# EAGLE board Skaarhoj BI8-c330 (EAGLE 6.2)
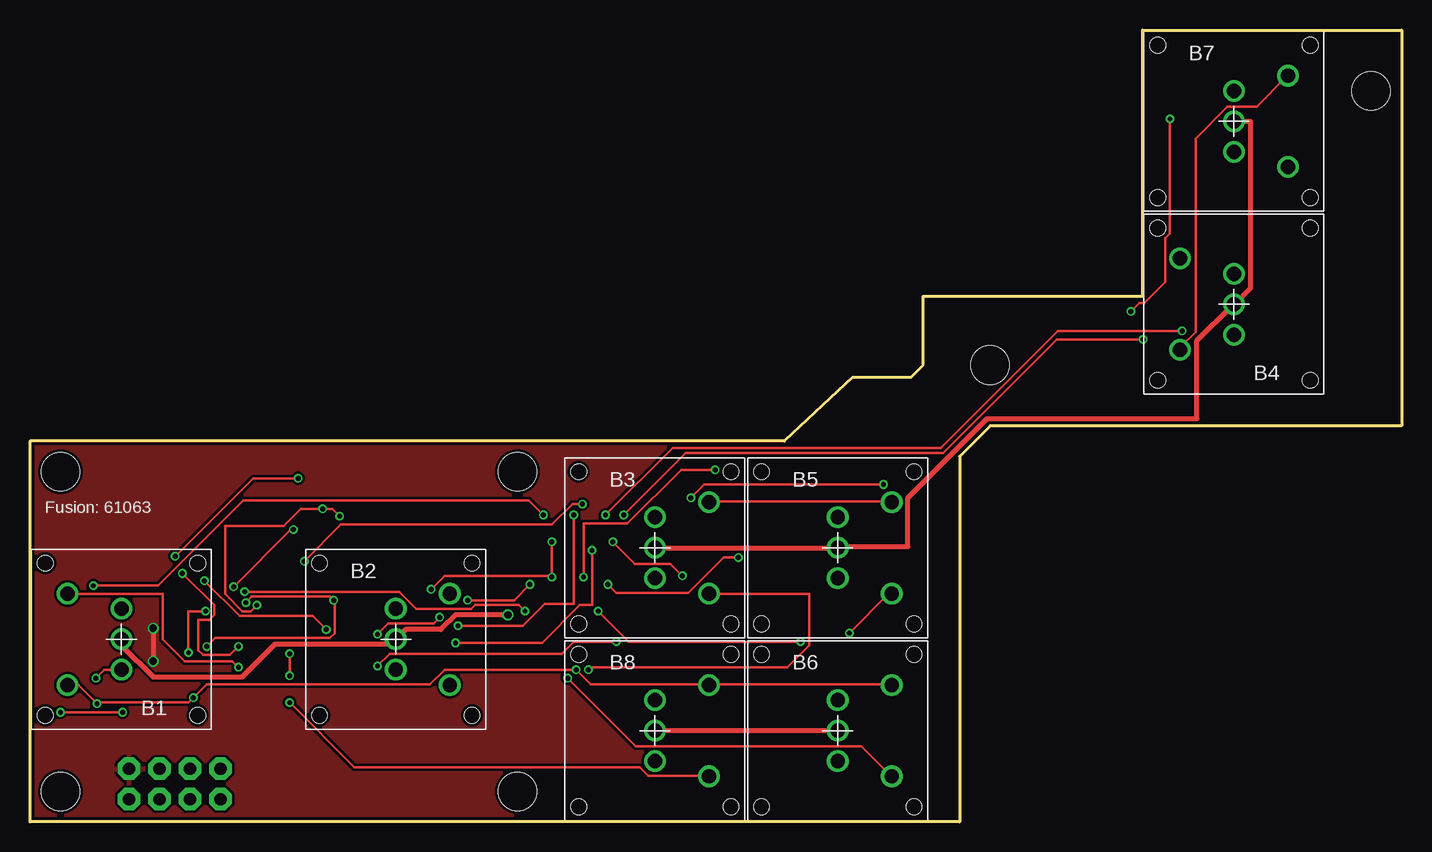
[diagram p0: board, top side]
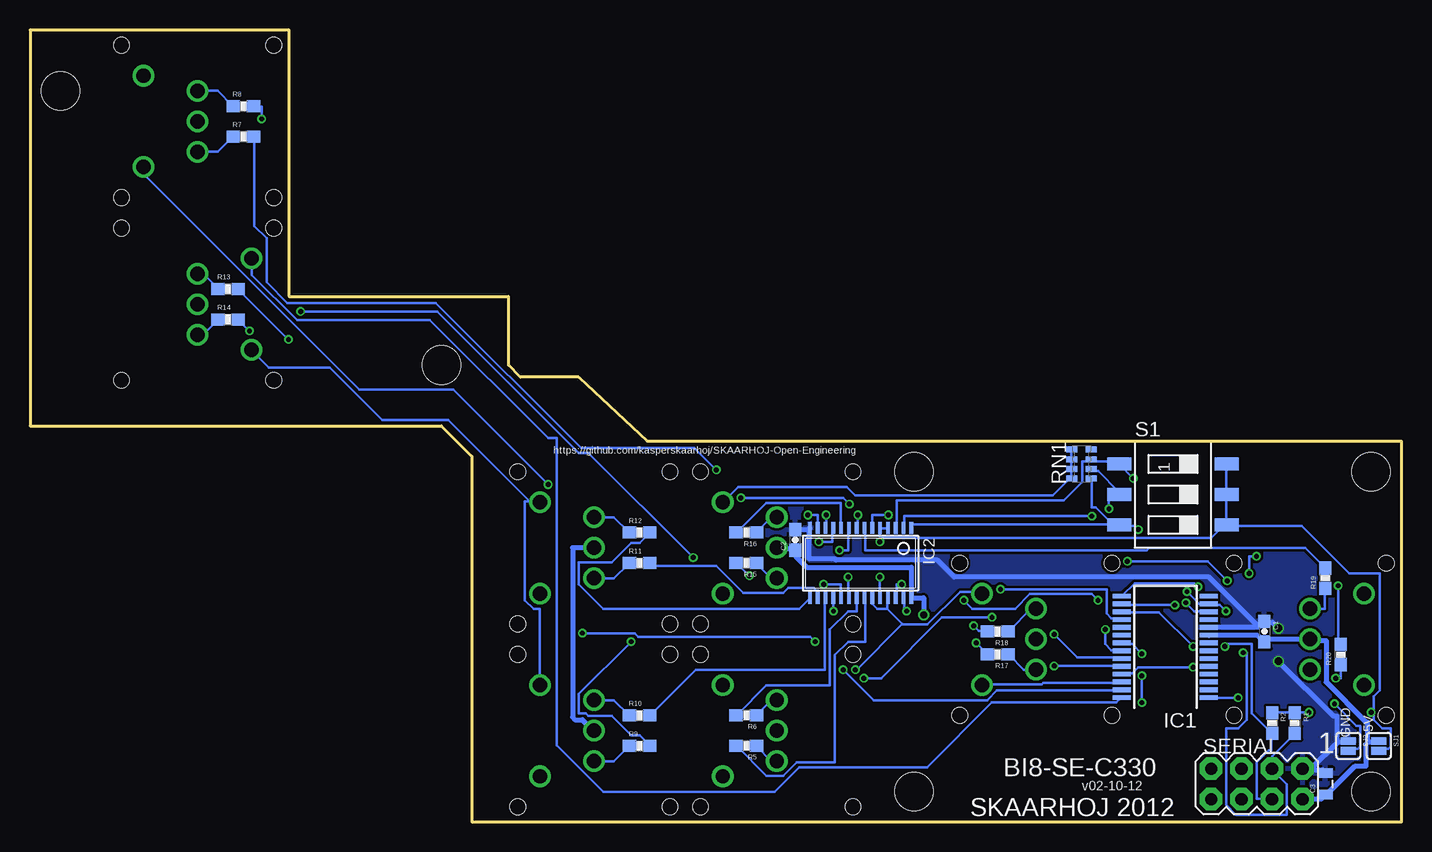
[diagram p1: board, bottom side, seen from below]

Size 114.3 x 66.04 mm. Coordinates in mm from the lower left corner, seen from the top.
Outline: 0,0 0,31.75 62.87,31.75 68.58,37.08 73.43,37.08 74.42,38.1 74.42,43.81 92.71,43.81 92.71,66.04 114.3,66.04 114.3,33.02 80.01,33.02 77.47,30.48 77.47,0 0,0
Copper layers (1*16): Top 0.035mm / dielectric 1.5mm / Bottom 0.035mm
Design rules: minimum track width 6mil, minimum drill 12mil, track to track 6mil, track to pad 6mil, pad to pad 6mil, via to via 6mil, smd to smd 0mil, copper to edge 10mil, drill to drill 10mil, minimum pad ring 10mil, minimum via ring 6mil, stop-mask expansion 2mil, vias tented up to drill 100mil, thermal gap 10mil
Net classes: 0 default: width 0.203 mm, drill 0.406 mm, clearance 0.203 mm; 1 Power: width 0.406 mm, drill 0.61 mm, clearance 0.203 mm
Holes 3.2 mm at 2.54,2.54 2.54,29.21 40.64,29.21 40.64,2.54 111.76,60.96 80.01,38.1

## Footprints (pad centres in the part's own frame; a part is rotated, then mirrored left to right if it is on the bottom)
LP11 = drill 1.2: COM 0,0; P$2 0,2.54; P$3 0,-2.54; P$4 4.5,3.81; P$5 4.5,-3.81 | hole 1.3: -6.35,6.35; 6.35,6.35; 6.35,-6.35; -6.35,-6.35
0603-CAP = smd 1.1 x 1: 1 -0.85,0; 2 0.85,0
0805 = smd 0.8 x 1.2: 1 -0.9,0; 2 0.9,0
SSOP28 = smd 0.4 x 1.5: 1 -4.225,-3.625; 2 -3.575,-3.625; 3 -2.925,-3.625; 4 -2.275,-3.625; 5 -1.625,-3.625; 6 -0.975,-3.625; 7 -0.325,-3.625; 8 0.325,-3.625; 9 0.975,-3.625; 10 1.625,-3.625; 11 2.275,-3.625; 12 2.925,-3.625; 13 3.575,-3.625; 14 4.225,-3.625; 15 4.225,3.625; 16 3.575,3.625; 17 2.925,3.625; 18 2.275,3.625; 19 1.625,3.625; 20 0.975,3.625; 21 0.325,3.625; 22 -0.325,3.625; 23 -0.975,3.625; 24 -1.625,3.625; 25 -2.275,3.625; 26 -2.925,3.625; 27 -3.575,3.625; 28 -4.225,3.625
TSSOP28 = smd 0.305 x 0.991: 1 -4.225,-2.918; 2 -3.575,-2.918; 3 -2.925,-2.918; 4 -2.275,-2.918; 5 -1.625,-2.918; 6 -0.975,-2.918; 7 -0.325,-2.918; 8 0.325,-2.918; 9 0.975,-2.918; 10 1.625,-2.918; 11 2.275,-2.918; 12 2.925,-2.918; 13 3.575,-2.918; 14 4.225,-2.918; 15 4.225,2.918; 16 3.575,2.918; 17 2.925,2.918; 18 2.275,2.918; 19 1.625,2.918; 20 0.975,2.918; 21 0.325,2.918; 22 -0.325,2.918; 23 -0.975,2.918; 24 -1.625,2.918; 25 -2.275,2.918; 26 -2.925,2.918; 27 -3.575,2.918; 28 -4.225,2.918
0603-RES = smd 1.1 x 1: 1 -0.85,0; 2 0.85,0
CAY16_HAND = smd 0.5 x 0.904: 1 -1.2,-0.813; 2 -0.4,-0.813; 3 0.4,-0.813; 4 1.2,-0.813; 5 1.2,0.813; 6 0.4,0.813; 7 -0.4,0.813; 8 -1.2,0.813
SMS-003 = smd 1.092 x 2.007: 1 -2.54,-4.496; 2 0,-4.496; 3 2.54,-4.496; 4 2.54,4.496; 5 0,4.496; 6 -2.54,4.496
2X4 = drill 1.016 pad 1.88 octagon: 1 -3.81,-1.27; 2 -3.81,1.27; 3 -1.27,-1.27; 4 -1.27,1.27; 5 1.27,-1.27; 6 1.27,1.27; 7 3.81,-1.27; 8 3.81,1.27
SJ_2S = smd 0.635 x 1.27: 1 -0.412,0; 2 0.412,0

## Placement (x,y rotation side)
B1  LP11-B"  [LP11]  7.62,15.24 180 top
B2  LP11-B"  [LP11]  30.48,15.24 0 top
B3  LP11-B"  [LP11]  52.07,22.86 0 top
B4  LP11-B"  [LP11]  100.33,43.18 180 top
B5  LP11-B"  [LP11]  67.31,22.86 0 top
B6  LP11-B"  [LP11]  67.31,7.62 0 top
B7  LP11-B"  [LP11]  100.33,58.42 0 top
B8  LP11-B"  [LP11]  52.07,7.62 0 top
C1  100nF  [0603-CAP]  11.43,15.88 270 bottom
C2  100nF  [0603-CAP]  50.52,23.52 90 bottom
C3  10uF  [0805]  6.35,3.17 90 bottom
IC1  MCP23017SS  [SSOP28]  19.68,14.61 90 bottom
IC2  PCA9685  [TSSOP28]  45.09,21.59 180 bottom
R1  10K  [0603-RES]  8.89,8.26 270 bottom
R2  10K  [0603-RES]  10.79,8.26 270 bottom
R5  270  [0603-RES]  54.61,6.35 180 bottom
R6  270  [0603-RES]  54.61,8.89 180 bottom
R7  270  [0603-RES]  96.52,57.15 0 bottom
R8  270  [0603-RES]  96.52,59.69 0 bottom
R9  270  [0603-RES]  63.5,6.35 0 bottom
R10  270  [0603-RES]  63.5,8.89 0 bottom
R11  270  [0603-RES]  63.5,21.59 0 bottom
R12  270  [0603-RES]  63.5,24.13 0 bottom
R13  270  [0603-RES]  97.79,44.45 0 bottom
R14  270  [0603-RES]  97.79,41.91 0 bottom
R15  270  [0603-RES]  54.61,21.59 180 bottom
R16  270  [0603-RES]  54.61,24.13 180 bottom
R17  270  [0603-RES]  33.66,13.97 180 bottom
R18  270  [0603-RES]  33.66,15.88 180 bottom
R19  270  [0603-RES]  6.35,20.32 90 bottom
R20  270  [0603-RES]  5.08,13.97 90 bottom
RN1  10K  [CAY16_HAND]  26.67,29.84 270 bottom
S1  SWS003  [SMS-003]  19.05,27.3 270 bottom
SERIAL  M04X2  [2X4]  12.06,3.17 180 bottom
SJ1  SOLDERJUMPERNC  [SJ_2S]  1.91,6.35 270 bottom
SJ2  SOLDERJUMPERNC  [SJ_2S]  4.45,6.35 270 bottom

## Library data of the parts
B1-B8 = SKAARHOJ
C1-C3 R1 R2 R5-R20 SERIAL SJ1 SJ2 = SparkFun
IC1 = microchip; MF: MICROCHIP; MPN: MCP23017-E/SS; OC_FARNELL: 1467674; OC_NEWARK: 31K2960
IC2 = wsmith
RN1 = SKAARHOJ; OC_FARNELL: unknown; OC_NEWARK: unknown
S1 = smd-special

## Nets
5V [Power]: B1.COM B2.COM B3.COM B4.COM B5.COM B6.COM B7.COM B8.COM C1.2 C2.1 C3.1 IC1.9 IC2.28 SERIAL.2 SJ1.1
5VL: IC1.18 IC2.4 IC2.5 IC2.24 R1.1 R2.1 S1.4 S1.5 S1.6 SJ1.2
A0: IC1.15 IC2.1 RN1.5 S1.3
A1: IC1.16 IC2.2 RN1.6 S1.2
A2: IC1.17 IC2.3 RN1.7 S1.1
DISP_DATA_OUT: SERIAL.6
GND [Power]: C1.1 C2.2 C3.2 IC1.10 IC2.14 SERIAL.1 SJ2.1
GNDL: B1.P$4 B2.P$4 B3.P$4 B4.P$4 B5.P$4 B6.P$4 B7.P$4 B8.P$4 IC1.1 IC2.23 IC2.25 RN1.1 RN1.2 RN1.3 RN1.4 SJ2.2
GPA0: B8.P$5 IC1.21
GPA1: B7.P$5 IC1.22
GPA2: B6.P$5 IC1.23
GPA3: B5.P$5 IC1.24
GPA4: B1.P$5 IC1.25
GPA5: B2.P$5 IC1.26
GPA6: B3.P$5 IC1.27
GPA7: B4.P$5 IC1.28
I2C_SCL: IC1.12 IC2.26 R2.2 SERIAL.4
I2C_SDA: IC1.13 IC2.27 R1.2 SERIAL.3
L0: B1.P$2 R20.1
L1: B1.P$3 R19.1
L2: B2.P$2 R18.1
L3: B2.P$3 R17.1
L4: B3.P$2 R16.1
L5: B3.P$3 R15.1
L6: B4.P$2 R14.1
L7: B4.P$3 R13.1
L8: B5.P$2 R12.1
L9: B5.P$3 R11.1
L10: B6.P$2 R10.1
L11: B6.P$3 R9.1
L12: B7.P$2 R8.1
L13: B7.P$3 R7.1
L14: B8.P$2 R6.1
L15: B8.P$3 R5.1
N$4: IC2.13 R13.2
N$5: IC2.12 R14.2
N$7: IC2.11 R15.2
N$9: IC2.10 R16.2
N$10: IC2.9 R17.2
N$11: IC2.8 R18.2
N$12: IC2.7 R19.2
N$19: IC2.6 R20.2
N$20: IC2.15 R12.2
N$21: IC2.16 R11.2
N$22: IC2.17 R10.2
N$23: IC2.18 R9.2
N$24: IC2.19 R8.2
N$25: IC2.20 R7.2
N$26: IC2.21 R6.2
N$27: IC2.22 R5.2
SDI_MOSI: SERIAL.8
SDI_SCLK: SERIAL.7
SLIDER_IN: SERIAL.5

## Tracks (layer width: path | path; a pad name or v marks a point on that pad's centre or on a via)
5V  (via drill 0.61)
  Top 0.406: B1.COM 7.62,14.73 10.26,12.09 17.68,12.09 20.42,14.83 30.07,14.83 B2.COM 31.29,16.05 34.24,16.05 35.46,17.27 v39.83,17.27 | B7.COM 101.7,58.42 101.7,44.5 100.38,43.18 B4.COM 100.18,43.08 97.23,40.13 97.23,33.63 79.76,33.63 73.15,27.03 73.15,22.96 67.46,22.96 B5.COM B3.COM | B6.COM B8.COM
  Bottom 0.406: SERIAL.2 8.23,1.93 6.71,1.93 6.4,2.23 C3.1 6.2,2.34 3.86,4.67 2.95,4.67 2.95,6.5 2.74,6.71 | 2.74,6.71 1.93,6.71 SJ1.1 | IC1.9 16.05,15.54 11.99,15.54 11.58,15.14 C1.2 11.38,15.04 11.18,15.24 B1.COM 7.52,15.14 6.3,15.14 6.3,11.68 2.95,8.33 2.85,8.33 2.85,6.81 2.74,6.71 | 40.84,18.69 40.84,21.23 49.58,21.23 50.49,22.15 50.49,22.66 C2.1 50.7,22.76 51.92,22.76 52.02,22.86 B3.COM | 40.84,18.69 IC2.28 | B5.COM 69.09,22.86 69.09,8.74 68.89,8.53 68.28,8.53 67.36,7.62 B6.COM | v39.83,17.27 39.83,18.69 40.84,18.69
5VL  (via drill 0.41)
  Top 0.203: v43.48,23.37 43.48,20.52 | v33.43,19.41 34.54,20.52 43.48,20.52 | 43.48,20.52 v43.48,20.42 | v2.54,9.14 v7.72,9.14
  Bottom 0.203: v43.48,20.42 43.48,18.69 IC2.24 | 43.48,23.67 43.48,24.49 IC2.5 43.38,24.49 42.88,24.49 IC2.4 | v33.43,19.41 24.59,19.41 24.59,17.37 24.18,16.97 23.37,16.97 IC1.18 | S1.6 14.63,29.77 14.63,27.33 S1.5 14.63,27.23 14.63,24.79 S1.4 | R2.1 10.77,9.14 8.94,9.14 R1.1 8.84,9.14 v7.72,9.14 | 2.34,9.14 2.34,10.46 1.83,10.97 1.83,20.73 4.37,20.73 8.33,24.69 14.53,24.69 S1.4 | 2.34,9.14 2.34,8.53 1.63,7.82 0.91,7.82 0.91,6.3 1.12,6.1 1.73,6.1 1.83,5.99 SJ1.2 | 2.34,9.14 v2.54,9.14 | 43.48,23.67 15.85,23.67 14.73,24.79 S1.4 | 43.48,23.67 v43.48,23.37
A0  (via drill 0.41)
  Top 0.203: v16.97,19.61 21.74,24.38 v21.95,24.38
  Bottom 0.203: RN1.5 25.81,28.55 25.81,26.21 25.5,26.21 24.08,24.79 23.57,24.79 S1.3 | IC2.1 40.84,24.59 40.64,24.79 24.18,24.79 S1.3 | v16.97,19.61 17.27,19.91 22.25,19.91 23.27,18.9 IC1.15 | v21.95,24.38 22.25,24.69 23.47,24.69 S1.3
A1  (via drill 0.41)
  Top 0.203: v25.81,25.5 25.2,26.11 v24.38,26.11 22.55,26.11 21.13,24.69 16.26,24.69 16.26,19 17.68,17.58 18.39,17.58 v18.9,18.09
  Bottom 0.203: RN1.6 25.81,29.36 25.7,29.26 25.3,29.26 23.57,27.53 23.57,27.33 S1.2 23.57,27.23 24.38,27.23 v24.38,26.11 | v25.81,25.5 41.45,25.5 41.45,24.59 IC2.2 | v18.9,18.09 23.27,18.09 IC1.16
A2  (via drill 0.41)
  Top 0.203: v17.37,14.63 16.66,13.92 14.43,13.92 14.02,14.33 14.02,16.87 14.94,16.87 15.34,17.27 15.34,18.09 v12.7,20.73 | v12.09,22.15 18.59,28.65 v22.35,28.65
  Bottom 0.203: IC2.3 42.06,24.59 42.06,26.82 28.14,26.82 26.62,28.35 26.62,30.07 25.81,30.07 RN1.7 25.81,30.18 25.7,30.07 23.77,30.07 S1.1 v22.35,28.65 | v17.37,14.63 20.22,17.48 23.27,17.48 IC1.17 | v12.7,20.73 12.7,22.15 v12.09,22.15
GND  (via drill 0.61)
  Top 0.406: v10.26,16.15 v10.26,13.41
  Bottom 0.406: C3.2 6.4,4.17 6.6,4.37 8.23,4.37 SERIAL.1 7.52,4.47 5.28,6.71 | 5.28,6.71 4.47,6.71 SJ2.1 | C2.2 50.49,24.38 49.48,24.38 49.38,24.49 IC2.14 49.38,24.28 49.38,21.95 47.24,21.95 47.14,21.84 38.71,21.84 37.29,20.42 16.05,20.42 11.89,16.26 | 11.89,16.26 11.48,16.66 C1.1 11.28,16.66 10.77,16.66 v10.26,16.15 | 11.89,16.26 16.05,16.26 IC1.10 | v10.26,13.41 5.69,8.84 5.38,8.84 5.38,6.81 5.28,6.71
  pour Bottom: 0,0 0,66.04 114.3,66.04 114.3,0
  pour Top: 0,0 0,66.04 114.3,66.04 114.3,1.91 114.3,0.64 79.38,0.64 79.38,0
GNDL  (via drill 0.41)
  Top 0.203: B1.P$4 3.15,11.38 4.06,11.38 v5.59,9.86 5.59,9.96 13.21,9.96 v13.61,10.36 14.73,11.48 33.33,11.48 34.54,12.7 v45.52,12.7 46.74,11.48 56.49,11.48 B8.P$4 56.59,11.48 71.73,11.48 B6.P$4 | B5.P$4 71.73,26.72 56.59,26.72 B3.P$4 | B7.P$4 104.75,62.18 102.21,59.64 99.77,59.64 97.13,57 97.13,40.84 95.91,39.62 95.91,39.42 B4.P$4
  Bottom 0.203: v5.59,9.86 3.76,8.03 3.45,8.03 3.45,6.3 3.66,6.1 4.27,6.1 4.37,5.99 SJ2.2 | v13.61,10.36 16.05,10.36 IC1.1 | 42.88,17.78 42.88,18.59 IC2.25 | 42.88,17.78 43.69,17.78 44.09,18.19 44.09,18.59 IC2.23 | 41.6,16.51 41.55,16.46 39.52,16.46 36.78,19.2 35.15,19.2 35.05,19.1 B2.P$4 | 41.6,16.51 42.88,17.78 | 41.6,16.51 45.41,12.7 v45.52,12.7 | RN1.1 27.53,30.99 27.53,30.28 RN1.2 27.53,30.18 27.53,29.46 RN1.3 27.53,29.36 27.53,28.65 RN1.4 27.64,28.65 29.06,27.23 45.52,27.23 46.23,27.94 55.27,27.94 56.49,26.72 B3.P$4 | 72.69,26.77 72.64,26.72 71.83,26.72 B5.P$4 | 72.69,26.77 79.45,33.53 84.94,33.53 89.31,37.9 94.39,37.9 95.81,39.32 B4.P$4 | B6.P$4 71.83,11.48 71.83,17.78 72.34,17.78 73.05,18.49 73.05,26.72 72.75,26.72 72.69,26.77
GPA0  (via drill 0.41)
  Top 0.203: v21.64,12.19 v21.64,14.02 | v21.64,9.96 27.03,4.57 50.8,4.57 51.51,3.86 56.49,3.86 B8.P$5
  Bottom 0.203: v21.64,14.02 22.45,14.83 23.27,14.83 IC1.21 | v21.64,9.96 v21.64,12.19
GPA1  (via drill 0.41)
  Top 0.203: v24.69,16.05 23.57,17.17 17.48,17.17 v14.53,20.12 | v22.86,21.74 25.91,24.79 43.48,24.79 45.21,26.52 v46.02,26.52 | v55.07,27.03 56.19,28.14 v71.12,28.14
  Bottom 0.203: v24.69,16.05 24.69,14.83 24.18,14.33 23.37,14.33 IC1.22 | v14.53,20.12 16.15,21.74 v22.86,21.74 | v46.02,26.52 46.53,27.03 v55.07,27.03 | v71.12,28.14 79.05,36.07 86.87,36.07 104.75,53.95 104.75,54.56 B7.P$5
GPA2  (via drill 0.41)
  Top 0.203: v28.96,15.65 29.87,16.56 33.63,16.56 v34.14,17.07 | v44.81,11.99 50.49,6.3 69.29,6.3 71.73,3.86 B6.P$5
  Bottom 0.203: v28.96,15.65 27.03,13.72 23.37,13.72 IC1.23 | v34.14,17.07 38.3,17.07 43.38,11.99 v44.81,11.99
GPA3  (via drill 0.41)
  Top 0.203: v28.96,13.01 29.97,14.02 44.3,14.02 45.31,15.04 v48.87,15.04 | v68.28,15.75 71.53,19 71.73,19 B5.P$5
  Bottom 0.203: v28.96,13.01 23.37,13.01 IC1.24 | v48.87,15.04 49.28,15.44 63.6,15.44 63.91,15.75 v68.28,15.75
GPA4  (via drill 0.41)
  Top 0.203: v17.37,12.9 16.87,13.41 12.9,13.41 11.07,15.24 11.07,19 3.15,19 B1.P$5
  Bottom 0.203: v17.37,12.9 21.95,12.9 22.45,12.39 23.27,12.39 IC1.25
GPA5
  Bottom 0.203: IC1.26 23.37,11.58 29.87,11.58 29.97,11.48 34.95,11.48 B2.P$5
GPA6  (via drill 0.41)
  Top 0.203: v46.53,12.7 46.74,12.9 63.09,12.9 64.92,14.73 64.92,19 56.59,19 B3.P$5
  Bottom 0.203: v46.53,12.7 43.99,10.16 34.54,10.16 33.73,10.97 23.37,10.97 IC1.27
GPA7
  Bottom 0.203: IC1.28 23.37,10.36 23.77,9.96 34.14,9.96 39.52,4.57 50.19,4.57 52.22,2.54 66.55,2.54 70.41,6.4 70.41,32 71.12,32 80.97,41.86 92.05,41.86 95.81,45.62 95.81,46.94 B4.P$5
I2C_SCL  (via drill 0.41)
  Top 0.203: v41.66,19.81 40.34,18.49 v36.47,18.49 | v17.98,18.29 18.49,18.8 24.99,18.8 v25.3,18.49 25.4,18.49 25.4,15.75 24.99,15.34 15.44,15.34 v14.73,14.63
  Bottom 0.203: SERIAL.4 10.87,1.93 12.09,1.93 12.09,4.98 11.07,5.99 10.87,5.99 10.87,7.32 R2.2 10.87,7.42 12.5,9.04 12.5,14.83 14.53,14.83 v14.73,14.63 | v41.66,19.81 42.06,19.81 42.06,18.69 IC2.26 | v36.47,18.49 35.76,17.78 32.21,17.78 30.99,19 25.81,19 v25.3,18.49 | v17.98,18.29 17.27,17.58 16.15,17.58 IC1.12
I2C_SDA  (via drill 0.41)
  Top 0.203: v41.25,17.58 40.74,18.09 37.08,18.09 36.78,17.78 32.21,17.78 30.79,19.2 v17.88,19.2 | v13.21,14.12 13.21,17.58 v14.63,17.58
  Bottom 0.203: R1.2 8.94,7.32 10.77,5.49 10.77,4.47 SERIAL.3 10.77,4.37 9.55,3.15 9.55,0.61 13.82,0.61 14.63,1.42 14.63,7.82 13.61,7.82 12.9,8.53 12.9,14.12 v13.21,14.12 | v41.25,17.58 41.45,17.58 41.45,18.59 IC2.27 | v17.88,19.2 16.87,18.19 16.15,18.19 IC1.13 16.05,18.09 15.14,18.09 v14.63,17.58
L0  (via drill 0.41)
  Top 0.203: v5.49,11.99 6.2,12.7 B1.P$2
  Bottom 0.203: R20.1 5.08,11.99 v5.49,11.99
L1
  Bottom 0.203: B1.P$3 6.4,17.78 6.4,19.41 R19.1
L2
  Bottom 0.203: B2.P$2 30.89,17.78 32.72,15.95 R18.1
L3
  Bottom 0.203: B2.P$3 31.5,12.7 32.72,13.92 R17.1
L4
  Bottom 0.203: B3.P$2 52.53,25.4 53.75,24.18 R16.1
L5
  Bottom 0.203: B3.P$3 52.53,20.32 53.75,21.54 R15.1
L6
  Bottom 0.203: B4.P$2 99.87,40.64 98.65,41.86 R14.1
L7
  Bottom 0.203: B4.P$3 99.87,45.72 98.65,44.5 R13.1
L8
  Bottom 0.203: B5.P$2 65.63,25.4 64.41,24.18 R12.1
L9
  Bottom 0.203: B5.P$3 65.63,20.32 64.41,21.54 R11.1
L10
  Bottom 0.203: B6.P$2 65.63,10.16 64.41,8.94 R10.1
L11
  Bottom 0.203: B6.P$3 65.63,5.08 64.41,6.3 R9.1
L12
  Bottom 0.203: B7.P$2 98.65,60.96 97.43,59.74 R8.1
L13
  Bottom 0.203: B7.P$3 98.65,55.88 97.43,57.1 R7.1
L14
  Bottom 0.203: B8.P$2 52.53,10.16 53.75,8.94 R6.1
L15
  Bottom 0.203: B8.P$3 52.53,5.08 53.75,6.3 R5.1
N$4  (via drill 0.41)
  Top 0.203: v49.48,25.6 54.66,30.79 76.1,30.79 85.55,40.23 v92.76,40.23
  Bottom 0.203: v49.48,25.6 48.67,25.6 48.67,24.59 IC2.13 | v92.76,40.23 96.93,44.4 R13.2
N$5  (via drill 0.41)
  Top 0.203: v47.95,25.6 53.54,31.19 75.89,31.19 85.65,40.95 v96.01,40.95
  Bottom 0.203: v47.95,25.6 47.95,24.59 IC2.12 | v96.01,40.95 96.93,41.86 R14.2
N$7  (via drill 0.41)
  Top 0.203: v48.56,23.37 50.39,21.54 53.34,21.54 v54.36,20.52
  Bottom 0.203: v48.56,23.37 47.45,23.37 47.45,24.49 IC2.11 | v54.36,20.52 55.37,21.54 R15.2
N$9
  Bottom 0.203: IC2.10 46.74,24.59 46.74,26.62 52.93,26.62 55.37,24.18 R16.2
N$10  (via drill 0.41)
  Top 0.203: v46.84,22.66 46.84,18.09 45.82,18.09 42.67,14.94 v35.46,14.94
  Bottom 0.203: v46.84,22.66 46.13,22.66 46.13,24.49 IC2.9 | v35.46,14.94 34.54,14.02 R17.2
N$11  (via drill 0.41)
  Top 0.203: v45.31,25.6 45.31,18.19 42.88,18.19 41.05,16.36 v35.66,16.36
  Bottom 0.203: v45.31,25.6 45.31,24.59 IC2.8 | v35.66,16.36 35.26,15.95 34.54,15.95 R18.2
N$12
  Bottom 0.203: IC2.7 44.7,24.49 44.7,22.66 21.23,22.66 21.03,22.86 8.03,22.86 6.4,21.23 R19.2
N$19  (via drill 0.41)
  Top 0.203: v42.77,25.6 41.55,26.82 17.78,26.82 10.67,19.71 v5.28,19.71
  Bottom 0.203: v42.77,25.6 44.09,25.6 44.09,24.59 IC2.6 | v5.28,19.71 5.28,14.83 5.08,14.83 R20.2
N$20
  Bottom 0.203: IC2.15 49.38,18.59 50.19,17.78 66.55,17.78 68.58,19.81 68.58,21.64 65.84,21.64 64.21,23.27 63.5,23.27 62.69,24.08 R12.2
N$21
  Bottom 0.203: IC2.16 48.67,18.69 48.67,19.3 48.77,19.3 48.97,19.51 51.1,19.51 51.51,19.1 54.86,19.1 57.1,21.34 62.38,21.34 62.59,21.54 R11.2
N$22
  Bottom 0.203: IC2.17 48.06,18.59 48.06,12.7 58.83,12.7 62.59,8.94 R10.2
N$23  (via drill 0.41)
  Top 0.203: v47.35,17.58 49.89,15.04 v64.21,15.04
  Bottom 0.203: v47.35,17.58 47.35,18.59 IC2.18 | v64.21,15.04 68.58,10.67 68.58,9.04 67.97,9.04 67.77,8.84 65.84,8.84 64.21,7.21 63.5,7.21 62.69,6.4 R9.2
N$24  (via drill 0.41)
  Top 0.203: v48.16,19.81 48.87,19.1 54.86,19.1 57.81,22.05 v59.03,22.05 | v91.75,42.57 92.46,43.28 92.86,43.28 94.59,45.01 94.59,48.67 95,49.07 v95,58.62
  Bottom 0.203: v48.16,19.81 46.74,19.81 46.74,18.69 IC2.19 | v59.03,22.05 67.77,30.79 68.58,30.79 80.37,42.57 v91.75,42.57 | v95,58.62 95,59.64 95.61,59.64 R8.2
N$25  (via drill 0.41)
  Top 0.203: v46.13,20.42 46.13,24.89 49.78,24.89 54.25,29.36 v57.1,29.36
  Bottom 0.203: v46.13,20.42 46.13,18.69 IC2.20 | v57.1,29.36 58.93,31.19 68.38,31.19 80.47,43.28 92.86,43.28 94.59,45.01 94.59,48.67 95.61,49.68 95.61,57.1 R7.2
N$26
  Bottom 0.203: IC2.21 45.41,18.59 45.41,17.58 46.13,17.58 47.65,16.05 47.65,11.38 52.93,11.38 55.37,8.94 R6.2
N$27
  Bottom 0.203: IC2.22 44.7,18.59 44.7,15.04 46.13,15.04 47.24,13.92 47.24,4.98 50.39,4.98 51.51,3.86 52.93,3.86 55.37,6.3 R5.2

## Text on the board
_tsilk: Fusion: 61063
_bsilk: https://github.com/kasperskaarhoj/SKAARHOJ-Open-Engineering | GND | 5V | 1 | BI8-SE-C330 | v02-10-12 | SKAARHOJ 2012